# EAGLE board piggyboard (EAGLE 6.5.0)

Size 100 x 80 mm. Coordinates in mm from the lower left corner, seen from the top.
Outline: 0,0 100,0 100,80 0,80 0,0
Copper layers (1*16): Top 0.035mm / dielectric 1.5mm / Bottom 0.035mm
Design rules "HTW-Labor": minimum track width 10mil, minimum drill 24mil, track to track 10mil, track to pad 10mil, pad to pad 10mil, via to via 10mil, smd to smd 10mil, copper to edge 80mil, drill to drill 10mil, minimum pad ring 10mil, minimum via ring 10mil, stop-mask expansion 4mil, vias tented up to drill 0mil, thermal gap 10mil

## Footprints (pad centres in the part's own frame; a part is rotated, then mirrored left to right if it is on the bottom)
TQFP-44 = smd 1.5 x 0.5: 1 -8.34,7.81; 2 -8.34,7.01; 3 -8.34,6.21; 4 -8.34,5.41; 5 -8.34,4.61; 6 -8.34,3.81; 7 -8.34,3.01; 8 -8.34,2.21; 9 -8.34,1.41; 10 -8.34,0.61; 11 -8.34,-0.19; 23 3.26,-0.19; 24 3.26,0.61; 25 3.26,1.41; 26 3.26,2.21; 27 3.26,3.01; 28 3.26,3.81; 29 3.26,4.61; 30 3.26,5.41; 31 3.26,6.21; 32 3.26,7.01; 33 3.26,7.81 | smd 0.5 x 1.5: 12 -6.54,-1.99; 13 -5.74,-1.99; 14 -4.94,-1.99; 15 -4.14,-1.99; 16 -3.34,-1.99; 17 -2.54,-1.99; 18 -1.74,-1.99; 19 -0.94,-1.99; 20 -0.14,-1.99; 21 0.66,-1.99; 22 1.46,-1.99; 34 1.46,9.61; 35 0.66,9.61; 36 -0.14,9.61; 37 -0.94,9.61; 38 -1.74,9.61; 39 -2.54,9.61; 40 -3.34,9.61; 41 -4.14,9.61; 42 -4.94,9.61; 43 -5.74,9.61; 44 -6.54,9.61 | drill 1 offset: P$1 -15.875,27.051; P$2 -13.335,27.051; P$3 -10.795,27.051; P$4 -8.255,27.051; P$5 -5.715,27.051; P$6 -3.175,27.051; P$7 -0.635,27.051; P$8 1.905,27.051; P$9 4.445,27.051; P$10 6.985,27.051; P$11 9.525,27.051; P$12 9.525,-27.051; P$13 6.985,-27.051; P$14 4.445,-27.051; P$15 1.905,-27.051; P$16 -0.635,-27.051; P$17 -3.175,-27.051; P$18 -5.715,-27.051; P$19 -8.255,-27.051; P$20 -10.795,-27.051; P$21 -13.335,-27.051; P$22 -15.875,-27.051; P$23 -19.431,15.875; P$24 -19.431,13.335; P$25 -19.431,10.795; P$26 -19.431,8.255; P$27 -19.431,5.715; P$28 -19.431,3.175; P$29 -19.431,0.635; P$30 -19.431,-1.905; P$31 -19.431,-4.445; P$32 -19.431,-6.985; P$33 -19.431,-9.525; P$34 14.351,15.875; P$35 14.351,13.335; P$36 14.351,10.795; P$37 14.351,8.255; P$38 14.351,5.715; P$39 14.351,3.175; P$40 14.351,0.635; P$41 14.351,-1.905; P$42 14.351,-4.445; P$43 14.351,-6.985; P$44 14.351,-9.525
HIROSE-MICROSD-V2 = smd 0.7 x 1.2: CD/DAT3 7.38,14.68; CDS-B -0.17,14.68; CLK 4.08,14.68; CMD 6.28,14.68; DAT0 1.88,14.68; DAT1 0.78,14.68; DAT2 8.48,14.68; VDD 5.18,14.68; VSS 2.98,14.68 | smd 1 x 0.8: CDS-A -1.17,4.28 | drill 1 offset: P$1 -6.985,24.511; P$2 -4.445,24.511; P$3 -1.905,24.511; P$4 0.635,24.511; P$5 3.175,24.511; P$6 5.715,24.511; P$7 8.255,24.511; P$8 10.795,24.511; P$9 13.335,24.511; P$10 15.875,24.511
DFN-2X2 = smd 0.35 x 0.65: FB 1,0; GND 0,2; GND1 1,2; GND2 1.5,2; GND3 1.5,0; SHDN 0,0; VIN 0.5,0; VOUT 0.5,2 | drill 1 offset: P$1 -3.175,8.001; P$2 -0.635,8.001; P$3 1.905,8.001; P$4 4.445,8.001; P$5 4.445,-5.461; P$6 1.905,-5.461; P$7 -0.635,-5.461; P$8 -3.175,-5.461

## Placement (x,y rotation side)
ATMEGA-1  324P  [TQFP-44]  30.48,62.23 90 top
ATMEGA-2  324P  [TQFP-44]  30.48,22.86 90 top
MICROSD-1  HIROSE-MICRO-SD  [HIROSE-MICROSD-V2]  71.12,69.85 270 top
MICROSD-2  HIROSE-MICRO-SD  [HIROSE-MICROSD-V2]  71.12,19.05 270 top
U$1  MCP1710  [DFN-2X2]  74.93,39.37 90 top
U$2  MCP1710  [DFN-2X2]  91.44,39.37 90 top

## Library data of the parts
ATMEGA-1 ATMEGA-2 = ATMega324P-piggy
MICROSD-1 MICROSD-2 = hirosemicrosd-piggy
U$1 U$2 = MCP1710T-piggy